# Altium PCB MMC_2_2-1.PcbDoc
Units mm, origin at the board's own origin, x right, y up, seen from the top; angles counter-clockwise.
Board outline 99.21 x 82.02 mm, 4 copper layers (Component Side, Ground Plane, Power Plane, Solder Side), stack 0.844 mm thick; 74 components, 76 nets, 315 pads, 9 vias.
Unrouted connection lines stored in the file: 188.
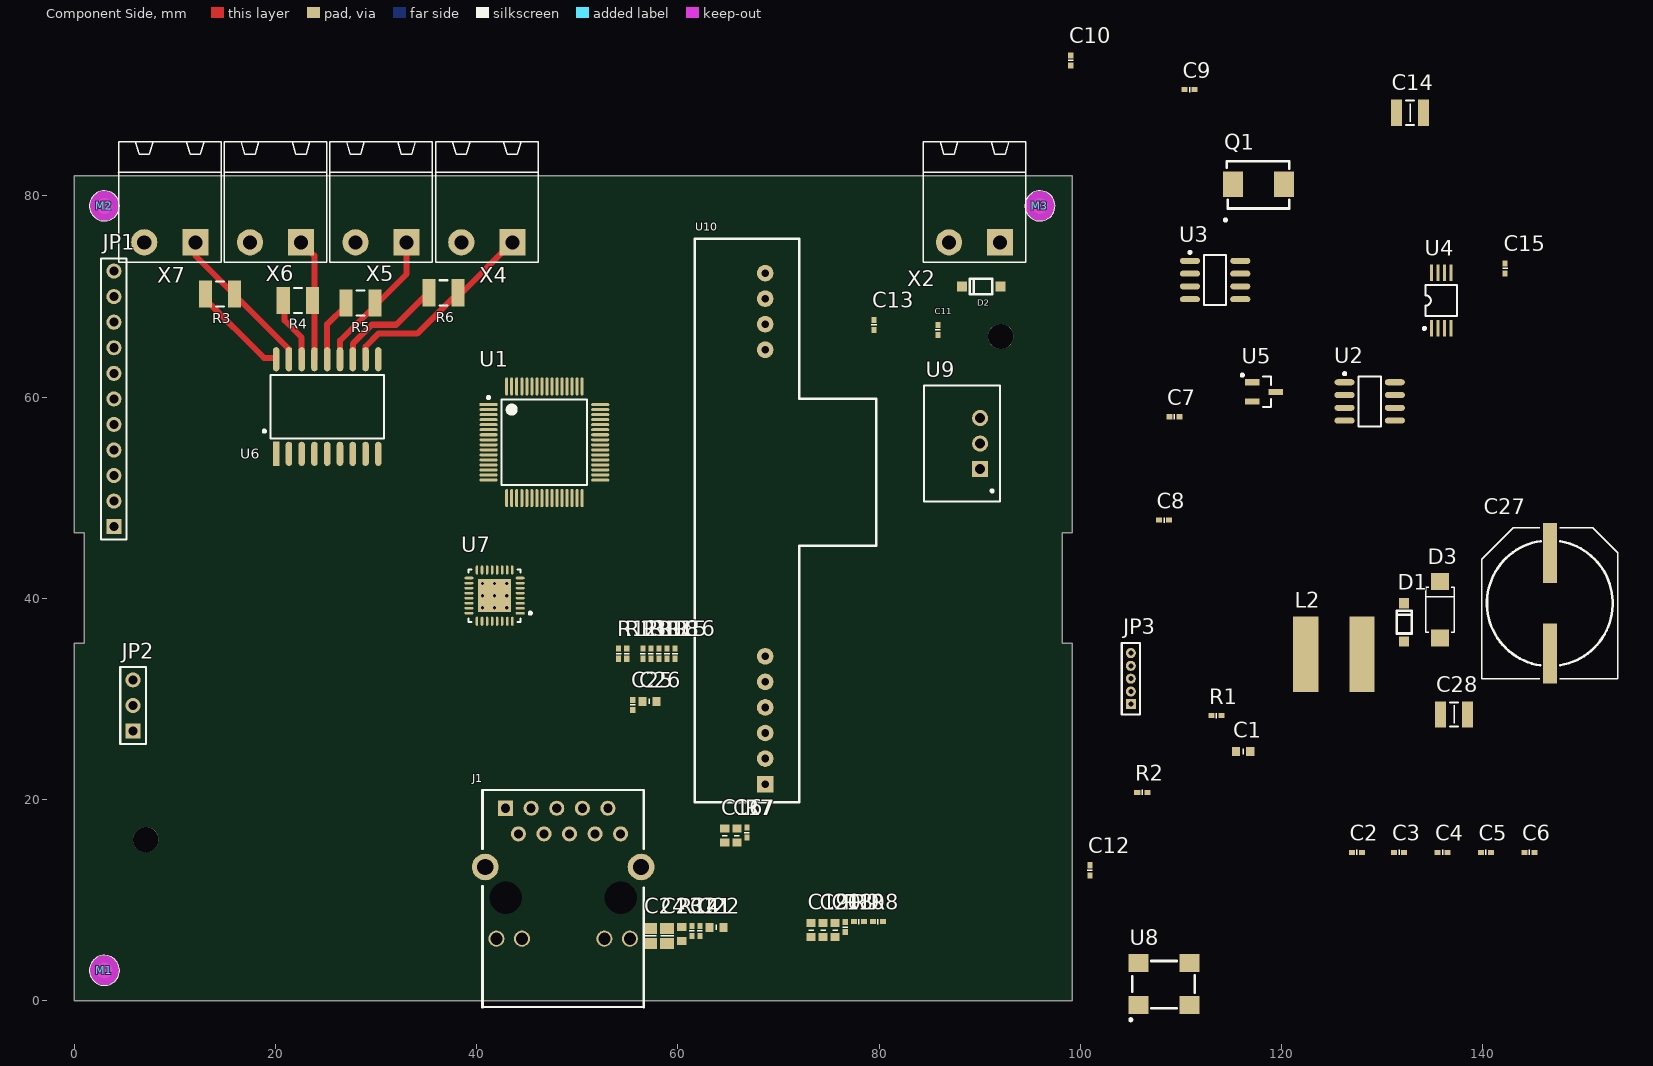
[diagram p0: Component Side view]
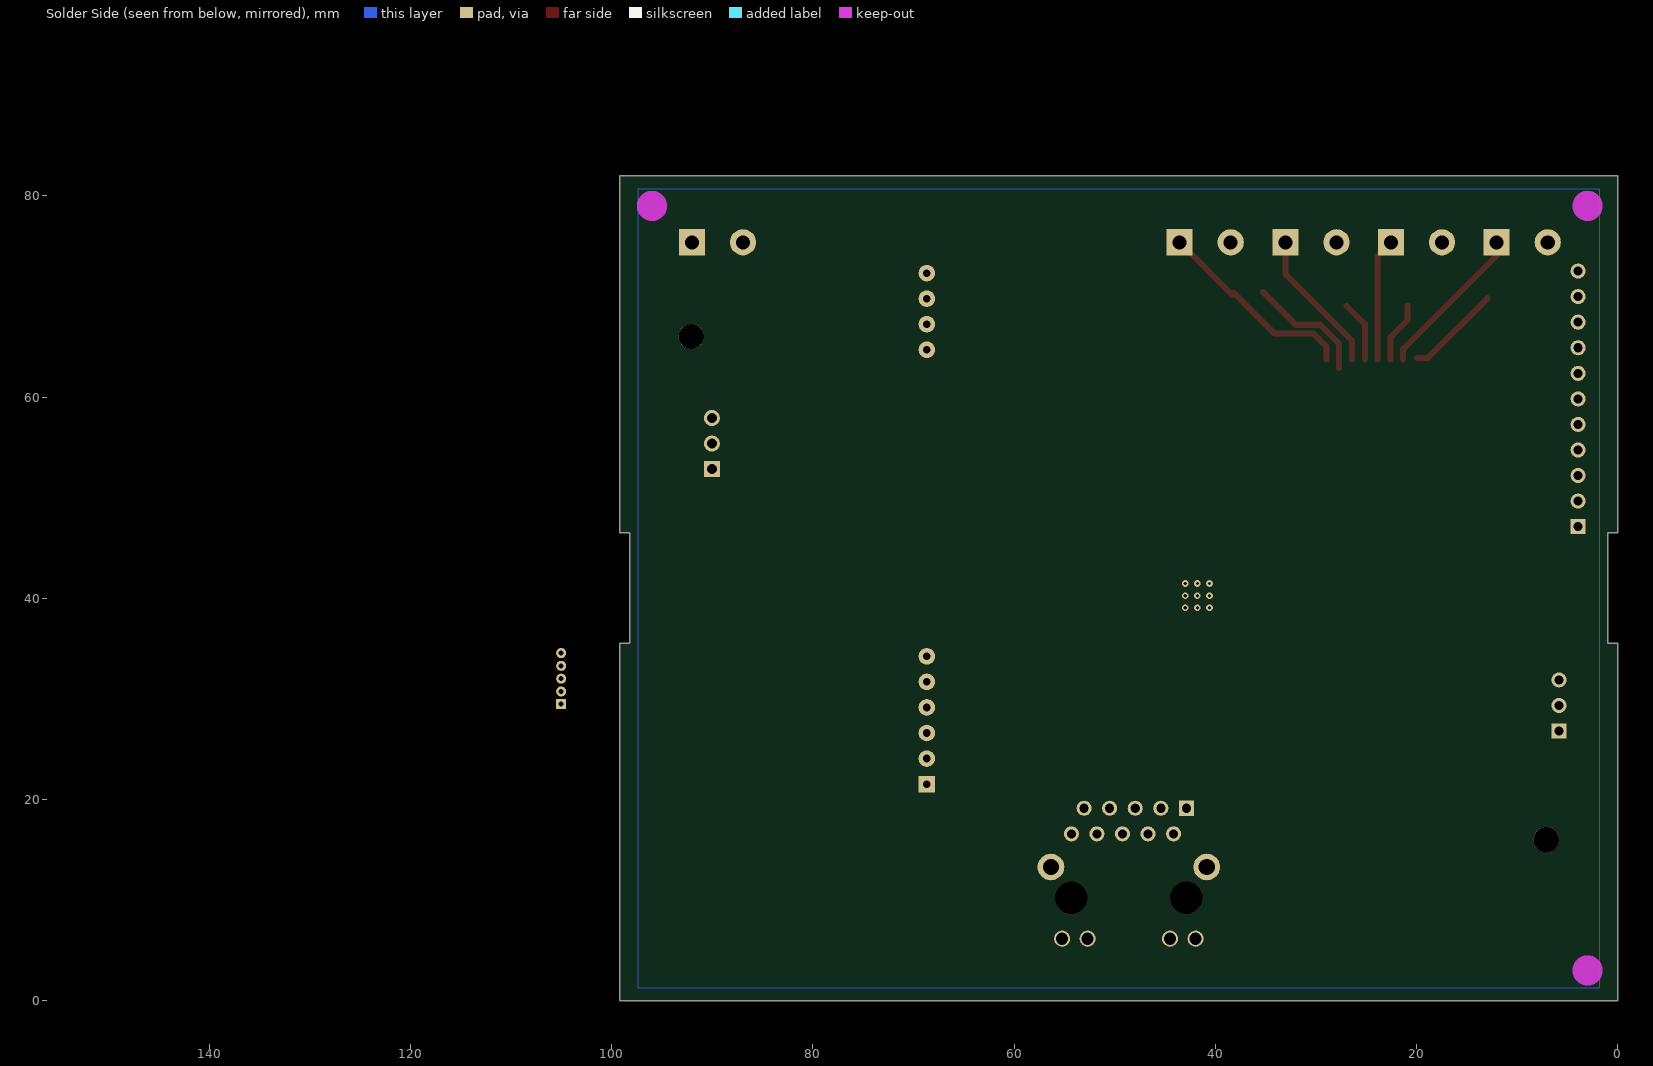
[diagram p1: Solder Side view, seen from below]
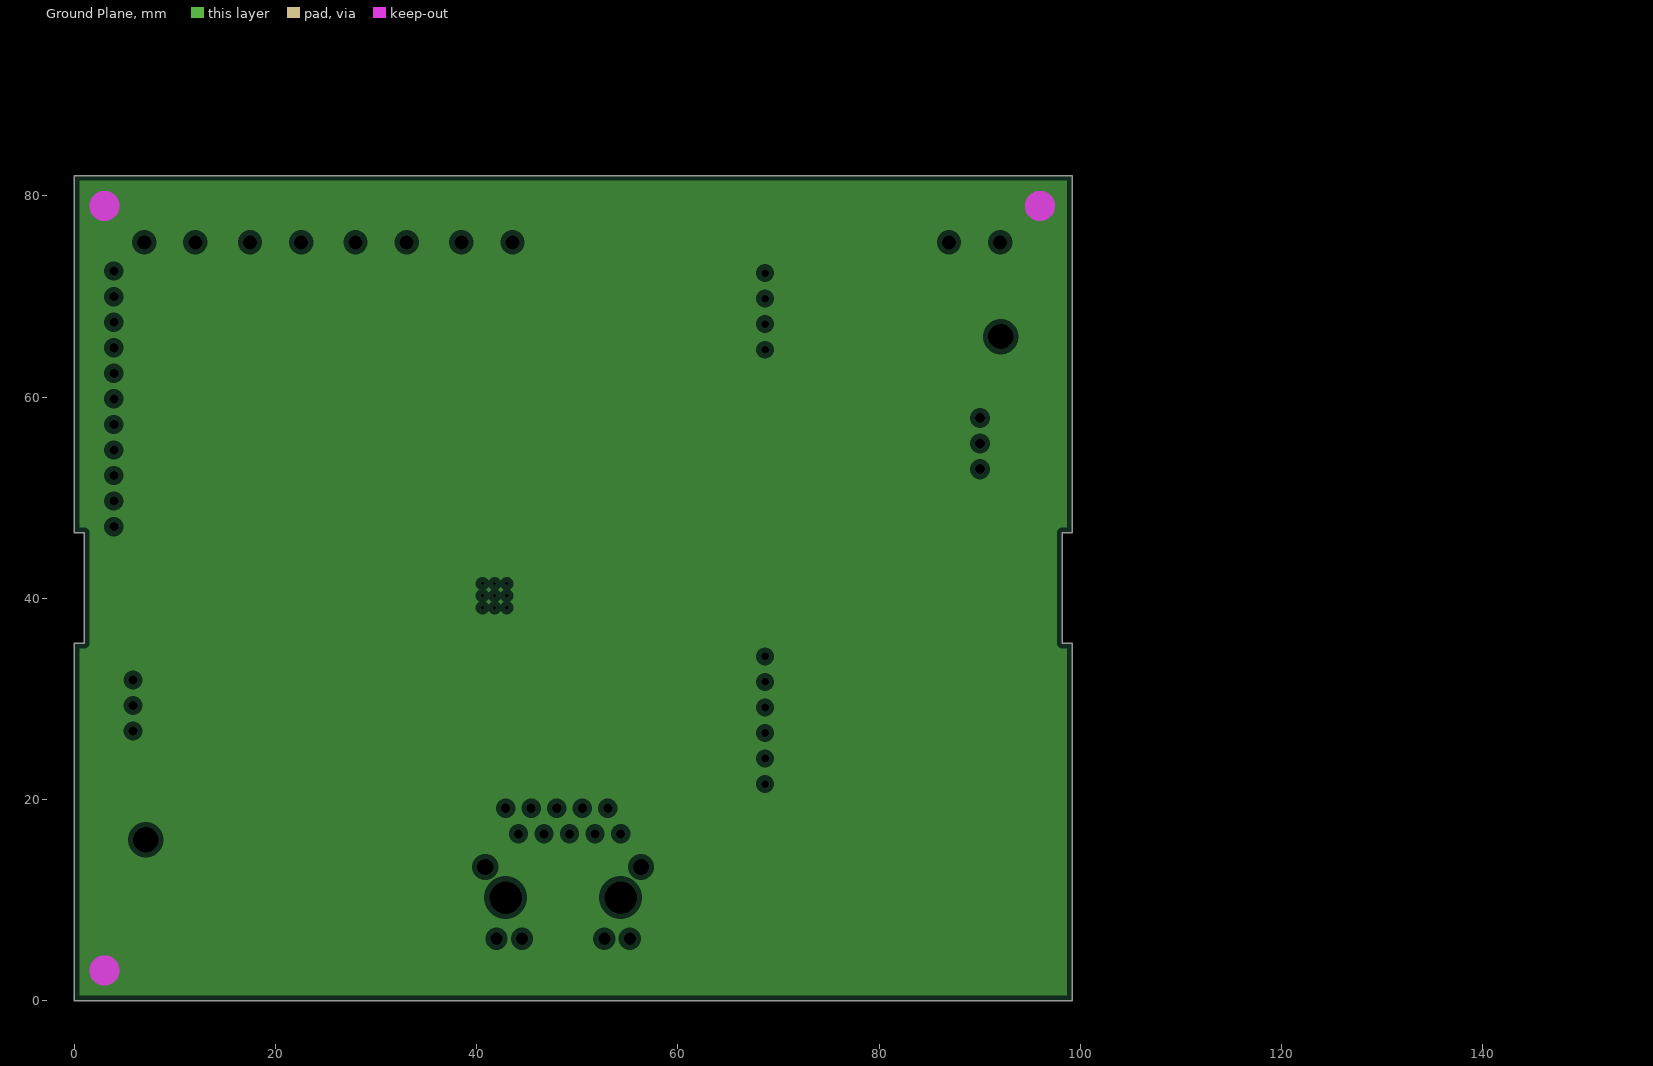
[diagram p2: Ground Plane, clearances drawn from the general rule]
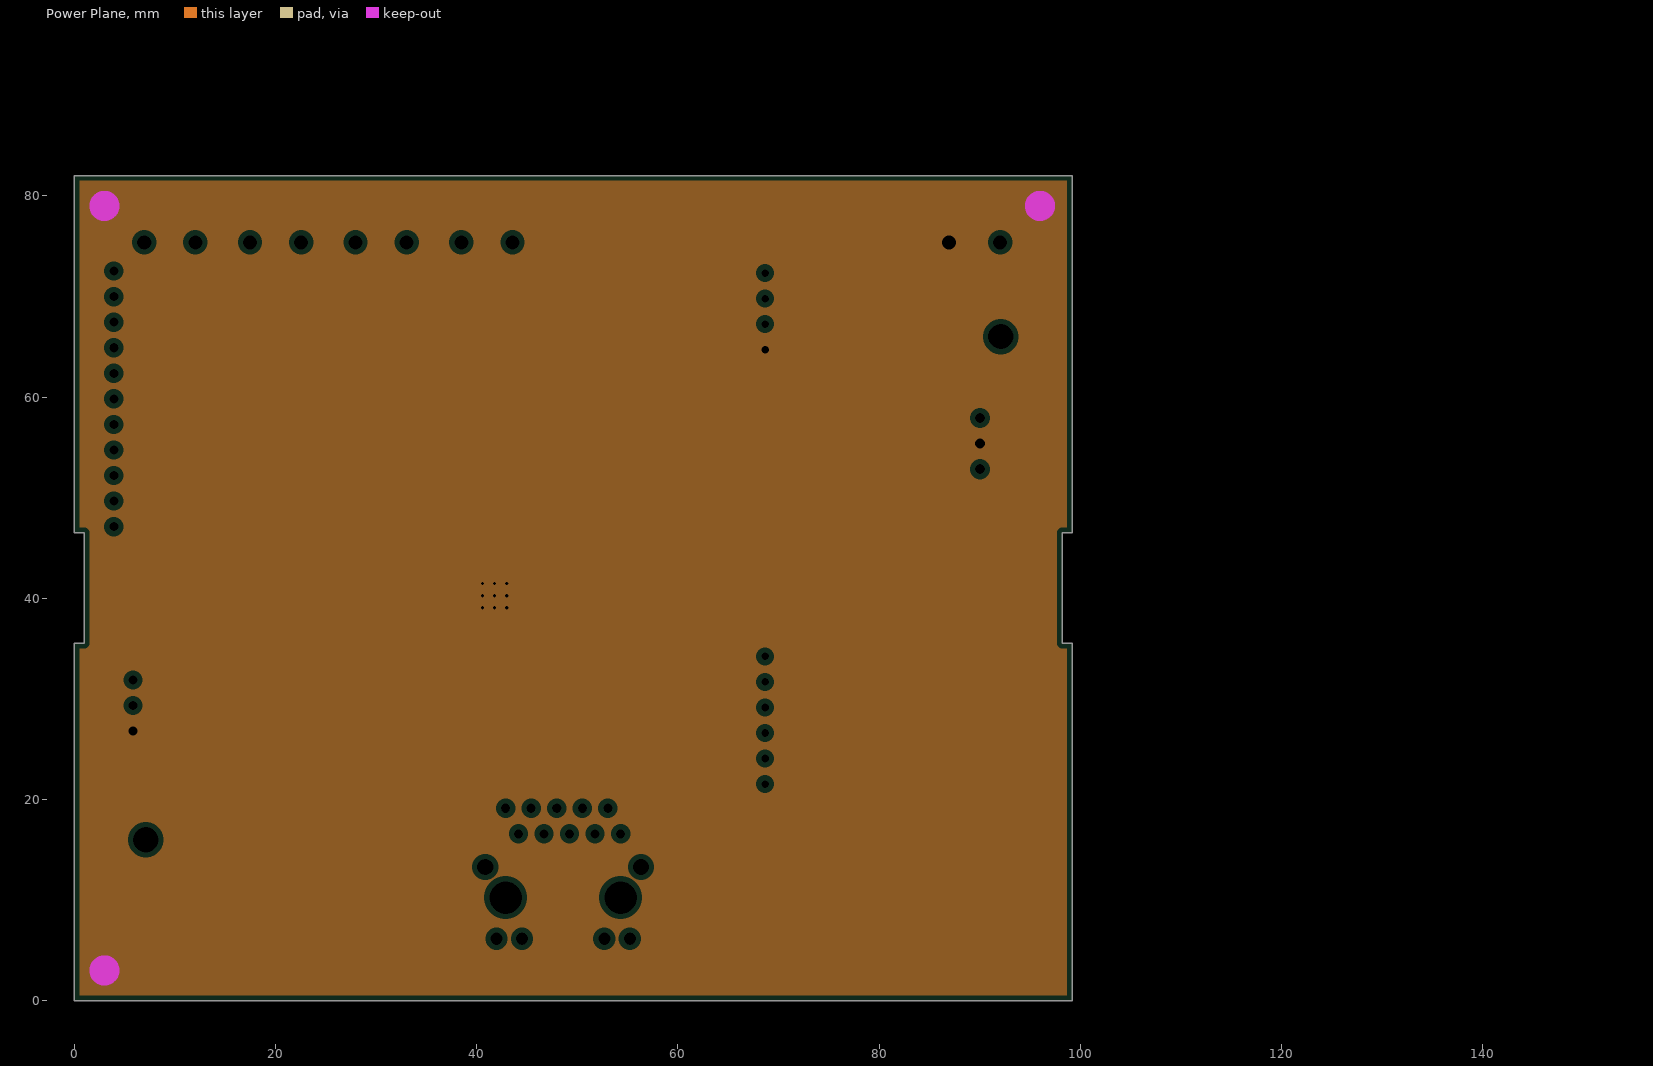
[diagram p3: Power Plane, clearances drawn from the general rule]

## Layer stack, top to bottom
Top Solder: solder mask 0.0102, Solder Resist, Dk 3.5
Component Side: signal copper 0.0356
Dielectric 1: core 0.32, FR-4, Dk 4.8
Ground Plane: plane copper 0.036
Dielectric 3: prepreg 0.127, Dk 4.2
Power Plane: plane copper 0.036
Dielectric 4: core 0.254, Dk 4.2
Solder Side: signal copper 0.0356
Bottom Solder: solder mask 0.0102, Solder Resist, Dk 3.5

## Board outline
0,0 0,35.509 1.016,35.509 1.016,46.507 0,46.507 0,82.017 99.212,82.017 99.212,46.507 98.222,46.507 98.222,35.509 99.212,35.509 99.212,0

## Design rules (kind name [scope] priority, off if disabled: settings)
Clearance [All] p1: gap=0.15
ComponentClearance [All] p1: gap=0 collisioncheckmode=3 verticalgap=0 showdistances=FALSE
MinimumSolderMaskSliver [All] p1: minsoldermaskwidth=0.12
PlaneClearance [All] p1: clearance=0.508
PlaneConnect [All] p1: planeconnectstyle=Relief reliefexpansion=0.508 reliefentries=4 reliefconductorwidth=0.254 reliefairgap=0.254
PolygonConnect [All] p1: connectstyle=Relief reliefconductorwidth=0.254 reliefentries=4 polygonreliefangle="90 Angle" airgapwidth=0.254
RoomDefinition MMC_2_2_PSU [InComponentClass('MMC_2_2_PSU')] p1: confinementstyle=ConfineIn formatcopy=TRUE lockcomponents=FALSE outline -14.097,-7.874 164.592,-7.874 164.592,96.266 -14.097,96.266
RoomDefinition MMC_2_2_Ethernet [InComponentClass('MMC_2_2_Ethernet')] p2: confinementstyle=ConfineIn formatcopy=TRUE lockcomponents=FALSE outline -26.797,-16.383 158.623,-16.383 158.623,105.283 -26.797,105.283
RoomDefinition MMC_2_2_MCU [InComponentClass('MMC_2_2_MCU')] p3: confinementstyle=ConfineIn formatcopy=TRUE lockcomponents=FALSE outline -25.4,-16.764 161.798,-16.764 161.798,100.203 -25.4,100.203
RoutingVias [All] p1: holewidth=0.711 width=1.27 viastyle="Through Hole" minholewidth=0.711 minwidth=1.27 maxholewidth=0.711 maxwidth=1.27
SolderMaskExpansion [All] p1: expansion=0.102
Width [All] p1: maxlimit=2 minlimit=0.254 preferedwidth=0.3
25 further rules are at their usual default settings.

## Classes and differential pairs
component class MMC_2_2_PSU: C13 C14 C15 C27 C28 D1 D2 D3 L2 U9 U10 X2
component class MMC_2_2_Ethernet: C12 C16 C17 C18 C19 C20 C21 C22 C23 C24 C25 C26 J1 L1 R2 R3 R4 R5 R6 R7 R8 R9 R10 R11 R12 R13 R14 R15 R16 R17 R18 U6 U7 U8 X4 X5 X6 X7
component class MMC_2_2_MCU: C1 C2 C3 C4 C5 C6 C7 C8 C9 C10 C11 JP1 JP2 JP3 M1 M2 M3 Q1 R1 U1 U2 U3 U4 U5

## Components (designator, comment, footprint, x,y, rotation, side; value= is the part's Value field where it differs from the comment)
C1 "10uF10V_0603" C0603 116.205,24.765 r0 top
C2 "100nF16V_0402" C0402 127.508,14.732 r0 top
C3 "100nF16V_0402" C0402 131.699,14.732 r0 top
C4 "100nF16V_0402" C0402 136.017,14.732 r0 top
C5 "100nF16V_0402" C0402 140.335,14.732 r0 top
C6 "100nF16V_0402" C0402 144.653,14.732 r0 top
C7 "22pF50V_0402" C0402 109.355,58.039 r0 top
C8 "22pF50V_0402" C0402 108.331,47.752 r0 top
C9 "100nF16V_0402" C0402 110.871,90.551 r0 top
C10 "100nF16V_0402" C0402 99.06,93.472 r90 top
C11 "100nF16V_0402" C0402 85.852,66.675 r90 top
C12 "100nF16V_0402" C0402 100.965,12.954 r90 top
C13 "100nF25V_0402" C0402 79.502,67.175 r90 top
C14 "10uF25V_1210" C1210 132.795,88.265 r0 top
C15 "100nF25V_0402" C0402 142.24,72.779 r90 top
C16 "22nF50V_0603" C0603 64.663,16.403 r90 top
C17 "10pF50V_0603" C0603 65.863,16.403 r90 top
C18 "10pF50V_0603" C0603 75.644,7.005 r90 top
C19 "10pF50V_0603" C0603 73.244,7.005 r90 top
C20 "10pF50V_0603" C0603 74.444,7.005 r90 top
C21 "100nF25V_0402" C0402 61.388,6.924 r90 top
C22 "100nF25V_0402" C0402 62.188,6.924 r90 top
C23 "4u7F25V_0805" C0805 58.938,6.424 r90 top
C24 "4u7F25V_0805" C0805 57.238,6.424 r90 top
C25 "470pF50V_0402" C0402 55.518,29.403 r90 top
C26 "1uF50V_0603" C0603 57.168,29.753 r0 top
C27 "470uF25V_POL" Panasonic-H13 146.685,39.497 r90 top
C28 "10uF50V_1210" C1210 137.16,28.448 r0 top
D1 "RB160M-30TR" SOD123 132.207,37.592 r90 top
D2 "SD103AW-V-GS08" SOD123 90.17,70.993 r180 top
D3 "SMAJ58A-E3/61" DO214A 135.763,38.862 r90 top
J1 "7499210121A" 7499210121A 48.6,10.23 r180 top locked
JP1 "Header 11_2.54" HDR1X11_2.54 3.937,59.817 r90 top
JP2 "Header-3" HDR1X3 5.842,29.337 r90 top
JP3 "ICDI" HDR1X5-1.27 105.029,32.004 r90 top
L1 "120R4A_0603" L0603 63.838,7.274 r0 top
L2 "10uF2A" WE-PD2_1 125.222,34.417 r0 top
M1 "Mark" Mark-3mm 3,3 r0 top
M2 "Mark" Mark-3mm 3,79 r0 top
M3 "Mark" Mark-3mm 96,79 r0 top
Q1 "7A-8.000MAAJ-T" TXC_7A 117.729,81.153 r0 top
R1 "10k_0402" R0402 113.538,28.321 r0 top
R2 "33R_0402" R0402 106.172,20.701 r0 top
R3 "270R_1210" R1210_N 14.478,70.231 r0 top
R4 "270R_1210" R1210_N 22.225,69.596 r0 top
R5 "270R_1210" R1210_N 28.448,69.342 r0 top
R6 "270R_1210" R1210_N 36.703,70.358 r0 top
R7 "49R9_0402" R0402 66.863,16.703 r90 top
R8 "49R9_0402" R0402 79.894,7.855 r0 top
R9 "49R9_0402" R0402 77.994,7.855 r0 top
R10 "49R9_0402" R0402 76.644,7.305 r90 top
R11 "10k_0402" R0402 56.521,34.483 r90 top
R12 "10k_0402" R0402 54.121,34.483 r90 top
R13 "1k5_0402" R0402 54.921,34.483 r90 top
R14 "12k1_0603" R0603(1608) 60.388,6.624 r90 top
R15 "10R_0402" R0402 58.921,34.483 r90 top
R16 "10R_0402" R0402 59.721,34.483 r90 top
R17 "10R_0402" R0402 57.321,34.483 r90 top
R18 "10R_0402" R0402 58.121,34.483 r90 top
U1 "PIC32MX695F512H-80I/PT" TQFP-64_N1 46.736,55.499 r0 top
U2 "25LC1024-I_SM" SOP8_N 128.778,59.563 r0 top
U3 "25LC1024-I_SM" SOP8_N 113.411,71.628 r0 top
U4 "23LC1024-I_ST" TSSOP8 135.89,69.596 r0 top
U5 "11AA02E48T-I_TT" SOT23_M 118.269,60.518 r0 top
U6 "ULN2803ADW" SOIC18-WIDE 25.146,59.055 r90 top
U7 "LAN8741-EN" 32M1-A_M 41.783,40.259 r180 top
U8 "TXC-7W-50.000MBB-T" TXC_7W 108.331,1.651 r0 top
U9 "R-783.3-0.5" R-783_3-0_5 90.043,55.372 r90 top
U10 "AG-9412-S" AG-9412-S-1 68.68,21.52 r90 top locked
X2 "PhoenixMSTBA-2" "MSTBA 2,5_2-G-5,08-LR" 89.5,75.4 r180 top locked
X4 "PhoenixMSTBA-2" "MSTBA 2,5_2-G-5,08-LR" 41.015,75.4 r180 top locked
X5 "PhoenixMSTBA-2" "MSTBA 2,5_2-G-5,08-LR" 30.5,75.4 r180 top locked
X6 "PhoenixMSTBA-2" "MSTBA 2,5_2-G-5,08-LR" 20.01,75.4 r180 top locked
X7 "PhoenixMSTBA-2" "MSTBA 2,5_2-G-5,08-LR" 9.5,75.4 r180 top locked

## Footprints (in the part's own frame and the unit in brackets; to place one, negate y for a bottom-side part, rotate by r counter-clockwise, add the part's x,y. Pads: shape width x height; smd on the part's side, far side on the other; paste and mask are expansions set on the pad)
32M1-A_M [mm] "QFN, 32-Leads, Body 5x5mm, Pitch 0.5mm, IPC Low Density"
  oval 0.9x0.25 smd: 1(-2.55,1.75) 2(-2.55,1.25) 3(-2.55,0.75) 4(-2.55,0.25) 5(-2.55,-0.25) 6(-2.55,-0.75) 7(-2.55,-1.25) 8(-2.55,-1.75) 17(2.55,-1.75) 18(2.55,-1.25) 19(2.55,-0.75) 20(2.55,-0.25) 21(2.55,0.25) 22(2.55,0.75) 23(2.55,1.25) 24(2.55,1.75)
  oval 0.25x0.9 smd: 9(-1.75,-2.55) 10(-1.25,-2.55) 11(-0.75,-2.55) 12(-0.25,-2.55) 13(0.25,-2.55) 14(0.75,-2.55) 15(1.25,-2.55) 16(1.75,-2.55) 25(1.75,2.55) 26(1.25,2.55) 27(0.75,2.55) 28(0.25,2.55) 29(-0.25,2.55) 30(-0.75,2.55) 31(-1.25,2.55) 32(-1.75,2.55)
  rect 3.3x3.3 smd: 33(0,0)
  silkscreen extent -3.68,-2.6 2.6,2.6, body extent -2.58,-2.58 2.58,2.58, height 1
7499210121A [mm] "Connector; PCB Jack, Thru-Hole; RJ45,POE; Shielded with Lightpipes; Right Angle"
  rect 1.5x1.5 hole 0.9: 1(5.715,-8.89)
  round 1.5 hole 0.9: 2(4.445,-6.35) 3(3.175,-8.89) 4(1.905,-6.35) 5(0.635,-8.89) 6(-0.635,-6.35) 7(-1.905,-8.89) 8(-3.175,-6.35) 9(-4.445,-8.89) 10(-5.715,-6.35)
  round 1.6 hole 1.2: 11(4.09,4.08) 12(6.63,4.08) 13(-4.09,4.08) 14(-6.63,4.08)
  round 2.65 hole 1.6: MH1(-7.745,-3.05) MH2(7.745,-3.05)
  round 2.95 hole 3.25 unplated: MH3(-5.715,0) MH4(5.715,0)
  silkscreen extent -8.02,-10.7 8.02,10.89, body extent -8,-10.67 8,11.18, height 13.74
AG-9412-S-1 [mm]
  rect 1.65x1.65 hole 0.762: 1(0,0)
  round 1.65 hole 0.762: 2(2.54,0) 3(5.08,0) 4(7.62,0) 5(10.16,0) 6(12.7,0) 7(43.18,0) 8(45.72,0) 9(48.26,0) 10(50.8,0)
  silkscreen extent -1.81,-11.02 54.2,6.98, body extent -1.8,-11 54.25,7, height 14
C0402 [mm] "Chip Capacitor, Body 1.0x0.5mm, IPC High Density"
  rect 0.6x0.5 smd: 1(-0.5,0) 2(0.5,0)
  silkscreen extent 0,-0.25 0,0.25, body extent -0.55,-0.3 0.55,0.3, height 0.5
C0603 [mm] "Chip Capacitor, 0603"
  rect 0.8x0.9 smd: 1(-0.7,0) 2(0.7,0)
  silkscreen extent 0,-0.25 0,0.25, body extent -0.87,-0.48 0.87,0.48, height 0.6
C0805 [mm] "Chip Capacitor, Body 2.0x1.3mm, IPC High Density"
  rect 1.1x1.4 smd: 1(-0.75,0) 2(0.75,0)
  silkscreen extent 0,-0.64 0,0.64, body extent -1.1,-0.72 1.1,0.72, height 1.4
C1210 [mm] "Chip Capacitor, Body 3.2x2.5mm, IPC High Density"
  rect 1.1x2.6 smd: 1(-1.35,0) 2(1.35,0)
  silkscreen extent -0.4,-1.2 0.4,1.2, body extent -1.7,-1.35 1.7,1.35, height 1.3
DO214A [mm] "Diode; 2 Leads"
  rect 1.7x1.8 smd: 1(2.8,0) 2(-2.8,0)
  silkscreen extent -2.25,-1.4 2.25,1.4, body extent -2.25,-1.4 2.25,1.4, height 2.3
HDR1X3 [mm] "Connector; Header; 3 Position"
  rect 1.5x1.5 hole 0.9: 1(-2.54,0)
  round 1.5 hole 0.9: 2(0,0) 3(2.54,0)
  silkscreen extent -3.81,-1.27 3.81,1.27, body extent -3.81,-1.27 3.81,1.27, height 7
HDR1X5-1.27 [mm] "Connector; Header; 5 Position"
  rect 1x1 hole 0.5: 1(-2.54,0)
  round 1 hole 0.5: 2(-1.27,0) 3(0,0) 4(1.27,0) 5(2.54,0)
  silkscreen extent -3.55,-0.9 3.55,0.9, body extent -3.56,-0.89 3.56,0.89, height 7
HDR1X11_2.54 [mm] "Connector; Header; 11 Position"
  rect 1.5x1.5 hole 0.9: 1(-12.7,0)
  round 1.5 hole 0.9: 2(-10.16,0) 3(-7.62,0) 4(-5.08,0) 5(-2.54,0) 6(0,0) 7(2.54,0) 8(5.08,0) 9(7.62,0) 10(10.16,0) 11(12.7,0)
  silkscreen extent -13.97,-1.27 13.97,1.27, body extent -13.97,-1.27 13.97,1.27, height 7
L0603 [mm] "Chip Ferrit, 0603"
  rect 0.8x0.9 smd: 1(-0.7,0) 2(0.7,0)
  silkscreen extent 0,-0.25 0,0.25, body extent -0.87,-0.48 0.87,0.48, height 0.6
Mark-3mm [mm]
  round 1.6 smd paste-2: 0(0,0)
  Keep-Out Layer circle w2: c0,0 r0.5
  silkscreen extent -1.5,-1.5 1.5,1.5
"MSTBA 2,5_2-G-5,08-LR" [mm]
  rect 2.6x2.6 hole 1.4: 1(-2.54,0.02)
  round 2.6 hole 1.4: 2(2.54,0.02)
  silkscreen extent -5.1,-10 5.11,2, body extent -5.09,-10 5.11,1.99, height 8.6
Panasonic-H13 [mm] "SMD electrolytic, Panasonic"
  rect 6x1.4 smd: 1(5,0) 2(-5,0)
  silkscreen extent -7.5,-6.75 7.5,6.75, body extent -7.5,-6.75 7.5,6.75, height 13
R0402 [mm] "Chip Resistor, Body 1.0x0.5mm"
  rect 0.6x0.5 smd: 1(-0.5,0) 2(0.5,0)
  silkscreen extent 0,-0.25 0,0.25, body extent -0.55,-0.3 0.55,0.3, height 0.55
R0603(1608) [mm] "Chip Resistor, 0603"
  rect 0.8x0.9 smd: 1(-0.7,0) 2(0.7,0)
  body extent -0.87,-0.48 0.87,0.48, height 0.6
R1210_N [mm] "Chip Resistor Body 3.2x2.5mm"
  rect 1.3x2.7 smd: 1(-1.45,0) 2(1.45,0)
  silkscreen extent -0.4,-1.25 0.4,1.25, body extent -1.7,-1.35 1.7,1.35, height 1.5
R-783_3-0_5 [mm] "Recon DC-DC"
  rect 1.6x1.6 hole 1: 1(-2.54,0)
  round 1.6 hole 1: 2(0,0) 3(2.54,0)
  silkscreen extent -5.75,-2 5.75,5.55, body extent -5.71,-2.03 5.71,5.59, height 10.2
SOD123 [mm]
  rect 1x1 smd: 1(1.905,0) 2(-1.905,0)
  silkscreen extent -1.1,-0.76 1.14,0.76, body extent -1.4,-0.85 1.4,0.88, height 1.4
SOIC18-WIDE [mm] "SOIC, 18-Leads"
  rect 2.4x0.65 smd: 1(-4.7,5.08)
  oval 2.4x0.65 smd: 2(-4.7,3.81) 3(-4.7,2.54) 4(-4.7,1.27) 5(-4.7,0) 6(-4.7,-1.27) 7(-4.7,-2.54) 8(-4.7,-3.81) 9(-4.7,-5.08) 10(4.7,-5.08) 11(4.7,-3.81) 12(4.7,-2.54) 13(4.7,-1.27) 14(4.7,0) 15(4.7,1.27) 16(4.7,2.54) 17(4.7,3.81) 18(4.7,5.08)
  silkscreen extent -3.2,-5.65 3.15,6.37, body extent -3.8,-5.65 3.85,5.64, height 1.91
SOP8_N [mm] "SOIC, 8-Leads, Body 4.9x3.9mm, Pitch 1.27mm, IPC Medium Density"
  oval 2x0.6 smd: 1(-2.5,1.905) 2(-2.5,0.635) 3(-2.5,-0.635) 4(-2.5,-1.905) 5(2.5,-1.905) 6(2.5,-0.635) 7(2.5,0.635) 8(2.5,1.905)
  silkscreen extent -2.62,-2.5 1.1,2.88, body extent -2,-2.5 2,2.5, height 1.75
SOT23_M [mm] "SOT23, 3-Leads, Body 2.9x1.3mm, Pitch 0.95mm, Lead Span 2.3mm - Reverse Pinning, IPC Low Density"
  rect 1.45x0.6 smd: 1(1.175,0) 2(-1.175,-0.95) 3(-1.175,0.95)
  silkscreen extent -2.28,-1.5 0.7,1.78, body extent -0.7,-1.5 0.7,1.5, height 1.1
TQFP-64_N1 [mm] "64-Pin Thin Plastic Quad Flat Pack 0.5 mm Pitch, 1.0/0.1 mm Lead Form, IPC Medium Density"
  rect 1.8x0.3 smd: 1(-5.55,3.75)
  oval 1.8x0.3 smd: 2(-5.55,3.25) 3(-5.55,2.75) 4(-5.55,2.25) 5(-5.55,1.75) 6(-5.55,1.25) 7(-5.55,0.75) 8(-5.55,0.25) 9(-5.55,-0.25) 10(-5.55,-0.75) 11(-5.55,-1.25) 12(-5.55,-1.75) 13(-5.55,-2.25) 14(-5.55,-2.75) 15(-5.55,-3.25) 16(-5.55,-3.75) 33(5.55,-3.75) 34(5.55,-3.25) 35(5.55,-2.75) 36(5.55,-2.25) 37(5.55,-1.75) 38(5.55,-1.25) 39(5.55,-0.75) 40(5.55,-0.25) 41(5.55,0.25) 42(5.55,0.75) 43(5.55,1.25) 44(5.55,1.75) 45(5.55,2.25) 46(5.55,2.75) 47(5.55,3.25) 48(5.55,3.75)
  oval 0.3x1.8 smd: 17(-3.75,-5.55) 18(-3.25,-5.55) 19(-2.75,-5.55) 20(-2.25,-5.55) 21(-1.75,-5.55) 22(-1.25,-5.55) 23(-0.75,-5.55) 24(-0.25,-5.55) 25(0.25,-5.55) 26(0.75,-5.55) 27(1.25,-5.55) 28(1.75,-5.55) 29(2.25,-5.55) 30(2.75,-5.55) 31(3.25,-5.55) 32(3.75,-5.55) 49(3.75,5.55) 50(3.25,5.55) 51(2.75,5.55) 52(2.25,5.55) 53(1.75,5.55) 54(1.25,5.55) 55(0.75,5.55) 56(0.25,5.55) 57(-0.25,5.55) 58(-0.75,5.55) 59(-1.25,5.55) 60(-1.75,5.55) 61(-2.25,5.55) 62(-2.75,5.55) 63(-3.25,5.55) 64(-3.75,5.55)
  silkscreen extent -5.67,-4.25 4.25,4.57, body extent -5,-5 5,5, height 1.2
TSSOP8 [mm] "Shrink Small Outline, Plastic, Thin; 8 Leads; Body Width 4.4 mm; Pitch 0.65 mm"
  rect 0.3x1.65 smd: 1(-0.975,-2.775) 2(-0.325,-2.775) 3(0.325,-2.775) 4(0.975,-2.775) 5(0.975,2.775) 6(0.325,2.775) 7(-0.325,2.775) 8(-0.975,2.775)
  silkscreen extent -1.8,-2.9 1.55,1.55, body extent -1.52,-1.52 1.52,1.52, height 1
TXC_7A [mm]
  rect 2x2.5 smd: 1(-2.54,0) 2(2.54,0)
  silkscreen extent -3.43,-3.68 3.05,2.29, body extent -3.17,-2.41 3.05,2.25, height 1.3
TXC_7W [mm]
  rect 2x1.8 smd: 1(-2.54,-2.1) 2(2.54,-2.1) 3(2.54,2.1) 4(-2.54,2.1)
  silkscreen extent -3.43,-3.68 3.05,2.29, body extent -3.17,-2.41 3.05,2.25, height 1.3
WE-PD2_1 [mm]
  rect 2.5x7.5 smd: 1(-2.794,0) 2(2.794,0)
  body extent -3.9,-3.49 3.89,3.49, height 5

## Part data
C1 C2 C3 C4 C5 C6 C9 C10 C11 C12 C14: "Capacitor"
C7 C8: "Murata, GRM series, 50V"
C13 C15 C21 C22: "AVX, X5R, 10%, 25V"
C16: "AVX ,  X7R, 5%, 50V"
C17 C18 C19 C20: "AVX ,  +-0.5pF, 50V"
C23 C24: "TDK  C series, X7R, 10%, 25V"
C25: "AVX, 50V"
C26: "C series, X5R, 10%"
C27: "Panasonic, TG series"
C28: "AVX,  X7R, 10%, 50V"
D1 D2: "Diode Schottky,2A,40V"
D3: "TVS, 400W, 58V"
J1: library part "Ethernet, POE, WE7499210121A", "Modular Jack , Right Angle RJ-45, Low Profile"
JP1: "Header, 11-Pin"
JP2: "Header-3-Pin"
JP3: "Header, 5-Pin"
L1: "Murata, Ferrit, 120Rx2A"
L2: library part 10uF2A_WE-PD2, "WE-PD2, 10uF2A"
Q1: library part Crystal_8MHz, "Crystal, 7A-8.000MAAJ-T"
R1 R11 R12 R13 R15 R16 R17 R18: "Vishay CRCW series, 125mW, 1%"
R2 R7 R8 R9 R10: "Vishay CRCW series, 63mW, 1%"
R3 R4 R5 R6: "ERJ series, 500mW, 5%"
R14: "Vishay, CRCW series, 100mW, 1%"
U1: "High Performance ROM-less Microcontroller with External Memory Bus, 1.5K RAM, 64-Pin TQFP, 4.2 to 5.5V Supply Range, Industrial Temperature"
U2 U3: "1024 Kbit Serial SPI Bus EEPROM"
U4: "1 Mbit Serial  EEPROM"
U5: "2 kbit Serial  EEPROM"
U6: "Darlington array, 50V"
U7: "Ethernet Phy"
U8: "Crystal"
U9: library part Recom-R-783_3-0_5, "Voltage Regulator"
U10: "PoE, 12V"

## Free pads (board coordinates)
  round 2.515 hole 2.515: 1(7.112,16) 1(92.1,66.015)

## Via types
v1: diameter 0.66, hole 0.33, Component Side to Solder Side, tented top, 9 vias

## Nets (pads, with @x,y where several pads share a name; then routed paths per layer and width w, separated by ;. In a path a pad name is that pad's centre, name@x,y a point inside that pad or via, vN(x,y) a via of type N, cw(c..) or ccw(c..) an arc to the next point about the centre after c; other vN are vias at no path point)
3V3: C2.1 C3.1 C4.1 C5.1 C6.1 C9.1 C10.1 C11.1 C12.1 C14.1 C15.1 C23.1 JP2.2 JP3.5 L1.2 R1.2 R12.2 R13.2 U1.10 U1.19 U1.26 U1.38 U1.57 U2.3 U2.7 U2.8 U3.3 U3.7 U3.8 U4.7 U4.8 U5.2 U7.12 U8.1 U8.4 U9.3
12V: C13.1 D1.1 D2.1 JP1.9 U9.1
GND: C1.2 C2.2 C3.2 C4.2 C5.2 C6.2 C7.2 C8.2 C9.2 C10.2 C11.2 C12.2 C13.2 C14.2 C15.2 C16.2 C17.2 C18.2 C19.2 C20.2 C21.2 C22.2 C23.2 C24.2 C25.2 C26.2 C27.2 C28.2 J1.12 J1.14 J1.MH1 J1.MH2 JP2.1 JP3.2 R11.1 R14.1 U1.9 U1.20 U1.25 U1.41 U2.4 U3.4 U4.4 U5.1 U6.9 U7.24 U7.25 U7.33 U8.2 U9.2 U10.7 X2.2
  other v1: 40.583,39.059 41.783,39.059 42.983,39.059 40.583,40.259 41.783,40.259 42.983,40.259 40.583,41.459 41.783,41.459 42.983,41.459
NetC1_1: C1.1 U1.56
NetC7_1: C7.1 Q1.1 U1.40
NetC8_1: C8.1 Q1.2 U1.39
NetC16_1: C16.1 C21.1 C22.1 C24.1 J1.3 J1.4 L1.1 R7.2 R8.2 R9.2 R10.2 U7.1 U7.27
NetC17_1: C17.1 J1.5 R7.1 U7.31
NetC18_1: C18.1 J1.2 R8.1 U7.28
NetC19_1: C19.1 J1.6 R9.1 U7.30
NetC20_1: C20.1 J1.1 R10.1 U7.29
NetC25_1: C25.1 C26.1 U7.6
NetC27_1: C27.1 L2.1 U10.8
NetC28_1: C28.1 D1.2 L2.2
NetD2_2: D2.2 X2.1
NetD3_1: D3.1 J1.9 U10.1
NetD3_2: D3.2 J1.10 U10.2
NetJ1_11: J1.11 U7.3
NetJ1_13: J1.13 R11.2 U7.2
NetJP1_1: JP1.1
NetJP1_2: JP1.2
NetJP1_3: JP1.3
NetJP1_4: JP1.4
NetJP1_5: JP1.5 U1.53
NetJP1_6: JP1.6 U1.42
NetJP1_7: JP1.7 U1.55
NetJP1_8: JP1.8 U1.33
NetJP1_10: JP1.10 U1.45
NetJP2_3: JP2.3 U1.54
NetJP3_1: JP3.1 U1.16
NetJP3_3: JP3.3 U1.15
NetJP3_4: JP3.4 R1.1 U1.7
NetR2_1: R2.1 U8.3
NetR2_2: R2.2 U1.63 U7.5
NetR3_1: R3.1 U6.18 | length 9.5
  Component Side w0.6: R3.1@12.928,69.824 18.87,63.881 U6.18@19.939,63.881
NetR3_2: R3.2 U6.17 X7.1 | length 15.5
  Component Side w0.6: X7.1 12.04,74.066 21.336,64.77 U6.17
NetR4_1: R4.1 U6.16 | length 6
  Component Side w0.6: R4.1@20.902,69.088 20.902,67.617 22.606,65.913 U6.16
NetR4_2: R4.2 U6.15 X6.1 | length 12.2
  Component Side w0.6: X6.1 23.876,74.054 U6.15
NetR5_1: R5.1 U6.14 | length 6
  Component Side w0.6: U6.14 25.146,67.236 R5.1@26.961,69.051
NetR5_2: R5.2 U6.13 X5.1 | length 14.4
  Component Side w0.6: U6.13 26.416,65.606 33.04,72.23 X5.1
NetR6_1: R6.1 U6.12 | length 12.1
  Component Side w0.6: U6.12@27.686,62.865 U6.12 27.686,65.278 29.591,67.183 32.004,67.183 R6.1@35.242,70.421
NetR6_2: R6.2 U6.11 X4.1 | length 20
  Component Side w0.6: U6.11 28.956,65.024 30.226,66.294 34.089,66.294 R6.2 ; R6.2@38.343,70.168 X4.1
NetR12_1: R12.1 U7.9
NetR13_1: R13.1 U1.49 U7.16
NetR14_2: R14.2 U7.32
NetR15_1: R15.1 U7.10
NetR15_2: R15.2 U1.60 U7.23
NetR16_1: R16.1 U7.11
NetR16_2: R16.2 U1.61
NetR17_1: R17.1 U7.13
NetR17_2: R17.2 U1.64
NetR18_1: R18.1 U7.15
NetR18_2: R18.2 U1.62
NetU1_1: U1.1 U7.21
NetU1_2: U1.2 U7.22
NetU1_3: U1.3
NetU1_4: U1.4
NetU1_5: U1.5 U1.6
NetU1_8: U1.8
NetU1_14: U1.14 U5.3
NetU1_17: U1.17 U4.1
NetU1_18: U1.18 U2.1
NetU1_21: U1.21 U3.1
NetU1_29: U1.29 U2.6 U3.6 U4.6
NetU1_30: U1.30 U7.17
NetU1_31: U1.31 U2.2 U3.2 U4.2
NetU1_32: U1.32 U2.5 U3.5 U4.5
NetU1_43: U1.43 U6.8
NetU1_44: U1.44 U6.6
NetU1_46: U1.46 U6.1
NetU1_47: U1.47 U6.4
NetU1_48: U1.48 U6.2
NetU1_50: U1.50 U6.7
NetU1_51: U1.51 U6.5
NetU1_52: U1.52 U6.3
VCC: U6.10 X4.2 X5.2 X6.2 X7.2
pads on no net: J1.7 J1.8 J1.MH3 J1.MH4 JP1.11 M1.0 M2.0 M3.0 U1.11 U1.12 U1.13 U1.22 U1.23 U1.24 U1.27 U1.28 U1.34 U1.35 U1.36 U1.37 U1.58 U1.59 U4.3 U7.4 U7.7 U7.8 U7.14 U7.18 U7.19 U7.20 U7.26 U10.3 U10.4 U10.5 U10.6 U10.9 U10.10

## Polygon pours and split planes (outlines as drawn)
GND on Solder Side "GND" (solid, shelved, pour order 2): 1.778,1.27 1.778,80.645 97.409,80.645 97.409,1.27 1.778,1.27
GND on Power Plane "GND" (none): 3.556,15.367 3.556,78.613 96.647,78.613 96.647,15.367 59.817,15.367 59.817,26.797 51.181,35.433 43.815,35.433 39.497,32.639 39.497,15.367
no net on Ground Plane (split plane): 98.702,47.018 98.222,47.018 98.122,47.008 98.026,46.979 97.938,46.932 97.861,46.868 97.797,46.791 97.75,46.703 97.721,46.607 97.711,46.507 97.711,35.509 97.721,35.41 97.75,35.314 97.797,35.226 97.861,35.148 97.938,35.085 98.026,35.038 98.122,35.009 98.222,34.999 98.702,34.999 98.702,0.51 0.51,0.51 0.51,34.999 1.016,34.999 1.116,35.009 1.211,35.038 1.3,35.085 1.377,35.148 1.44,35.226 1.488,35.314 1.517,35.41 1.526,35.509 1.526,46.507 1.517,46.607 1.488,46.703 1.44,46.791 1.377,46.868 1.3,46.932 1.211,46.979 1.116,47.008 1.016,47.018 0.51,47.018 0.51,81.506 98.702,81.506
no net on Power Plane (split plane): 98.702,47.018 98.222,47.018 98.122,47.008 98.026,46.979 97.938,46.932 97.861,46.868 97.797,46.791 97.75,46.703 97.721,46.607 97.711,46.507 97.711,35.509 97.721,35.41 97.75,35.314 97.797,35.226 97.861,35.148 97.938,35.085 98.026,35.038 98.122,35.009 98.222,34.999 98.702,34.999 98.702,0.51 0.51,0.51 0.51,34.999 1.016,34.999 1.116,35.009 1.211,35.038 1.3,35.085 1.377,35.148 1.44,35.226 1.488,35.314 1.517,35.41 1.526,35.509 1.526,46.507 1.517,46.607 1.488,46.703 1.44,46.791 1.377,46.868 1.3,46.932 1.211,46.979 1.116,47.008 1.016,47.018 0.51,47.018 0.51,81.506 98.702,81.506

## Silkscreen, mask and mechanical layers (free items; w line width, h text height)
Mechanical 17:
  lines w0.05: 3.556,15.367 3.556,78.613 96.647,78.613 96.647,15.367 59.817,15.367 59.817,26.797 51.181,35.433 43.815,35.433 39.497,32.639 39.497,15.367 3.556,15.367 ; 40.005,14.859 40.005,32.512 43.942,35.052 51.054,35.052 54.61,31.496 54.61,20.828 52.07,20.828 52.07,14.859 40.005,14.859
Mechanical 32:
  the board outline again, w0.254